# Altium PCB Pet_Feeder_PCB.PcbDoc (part 2 of 3)
Units mil, origin at the board's own origin, x right, y up, seen from the top; angles counter-clockwise.
Board outline 3600 x 2700 mil, 2 copper layers (Top Layer, Bottom Layer); 99 components, 71 nets, 320 pads, 396 vias.
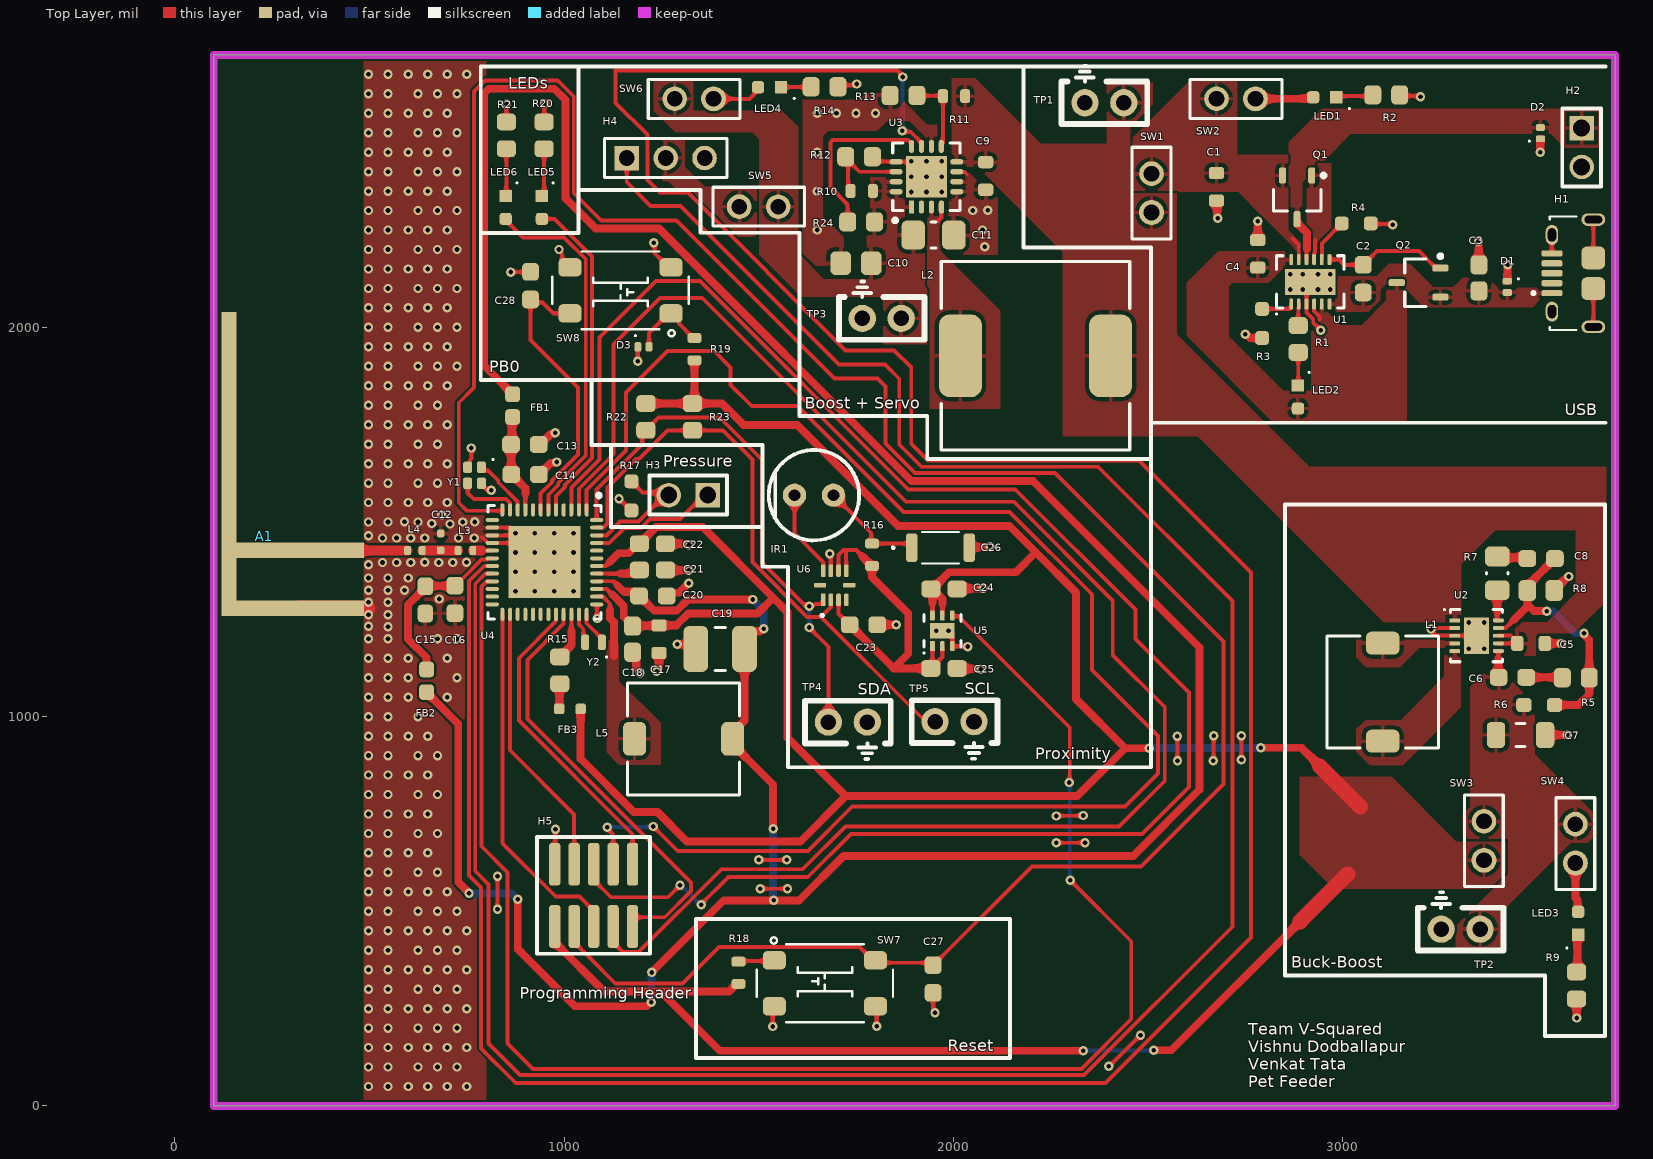
[diagram p0: Top Layer view]

## Part data (continued)
H5: library part FTSH-105-01-LM-DV-K, "Conn Unshrouded Header HDR 10 POS 1.27mm Solder ST Top Entry SMD Tube", Housing Color=Black, Manufacturer=Samtec, Max Operating Temperature=125°C, Min Operating Temperature=-55°C, Category=Connectors, ComponentLink1Description=https://datasheet.ciiva.com/10245/ftsh-mt-10245149.pdf?src-supplier=Avnet, ComponentLink1URL=https://datasheet.ciiva.com/10245/ftsh-mt-10245149.pdf?src-supplier=Avnet, ComponentLink2Description=https://datasheet.ciiva.com/16689/ftsh-mt-16689356.pdf?src-supplier=Avnet+Europe, ComponentLink2URL=https://datasheet.ciiva.com/16689/ftsh-mt-16689356.pdf?src-supplier=Avnet+Europe, Contact Material=Bronze, Contact Plating=Gold, Depth=3.43mm, Gender=Male, Housing Material=Polymer, Length=6.35mm, Manufacturer Part Number=FTSH-105-01-LM-DV-K, Number of Contacts=10, Number of Rows=2, Orientation=Straight, Packaging=Rail/Tube, Pitch=1.27mm, Pricing 1="1=4.62000, 10=4.19500, 92=3.69598, 460=3.14161, 1012=2.67960 (USD)", Radiation Hardening=No, RoHS=Yes, Stock 1=11199, Supplier 1=Digi-Key, Termination=Solder
IR1: library part IR333-A, "λP=940nm VF=1.2V View Angle=20", Case/Package=Radial, Forward Current=50mA, Forward Voltage=1.2V, Manufacturer=Everlight, Max Operating Temperature=85°C, Max Power Dissipation=100mW, Min Operating Temperature=-40°C, Package Quantity=500, Reverse Voltage=5V, Test Current=20mA, Category=LEDs, ComponentLink1Description=https://datasheet.ciiva.com/2107/201407061516067600-2107736.pdf?src-supplier=Digi-Key, ComponentLink1URL=https://datasheet.ciiva.com/2107/201407061516067600-2107736.pdf?src-supplier=Digi-Key, ComponentLink2Description=https://datasheet.ciiva.com/48438/ir333-a-eng-tds-48438869.pdf?src-supplier=Distrelec, ComponentLink2URL=https://datasheet.ciiva.com/48438/ir333-a-eng-tds-48438869.pdf?src-supplier=Distrelec, Depth=5.9mm, Lead Free="Lead Free", Length=5.9mm, Lens Style=Diffused,Colored,Circular, Manufacturer Part Number=IR333-A, Mount="Through Hole", Number of Elements=1, Number of LEDs=1, Number of Pins=2, Orientation="Top View", Packaging=Bulk, Power Dissipation=100mW, Pricing 1="1=0.32000, 10=0.25600, 100=0.11500, 500=0.10388, 1000=0.08533, 2000=0.07420, 5000=0.06678, 10000=0.05936, 25000=0.05565 (USD)", RoHS=Yes, RoHS Compliant=Yes, Series=-, Stock 1=45297, Supplier 1=Digi-Key, Viewing Angle=20°, Wavelength=940nm
L1 L5: library part B82472G6472M000, "Ind Power Shielded 4.7uH 20% 100KHz Ferrite 2.5A Blister T/R", Case/Package=SMD/SMT, DC Current=2.5A, DC Resistance (DCR)=30mR, Inductance=4.7uH, Inductance Tolerance=20%, Inductor Type=POWER, Manufacturer="TDK EPCOS", Max DC Current=2A, Package Quantity=1000, Test Frequency=100kHz, Category="Fixed Inductors", ComponentLink1Description=https://datasheet.ciiva.com/5874/78362-5874896.pdf?src-supplier=Farnell, ComponentLink1URL=https://datasheet.ciiva.com/5874/78362-5874896.pdf?src-supplier=Farnell, ComponentLink2Description=https://datasheet.ciiva.com/8003/78362-8003419.pdf?src-supplier=Element14, ComponentLink2URL=https://datasheet.ciiva.com/8003/78362-8003419.pdf?src-supplier=Element14, ComponentLink3Description=https://datasheet.ciiva.com/22700/1899161-22700808.pdf?src-supplier=Element14, ComponentLink3URL=https://datasheet.ciiva.com/22700/1899161-22700808.pdf?src-supplier=Element14, Core Material=Ferrite, Depth=7.5mm, Height=4.5mm, Length=7.3mm, Manufacturer Part Number=B82472G6472M000, Military Standard=Not, Mount="Surface Mount", Number of Pins=2, Packaging="Tape and Reel", Pricing 1="1=1.55000, 10=1.43500, 25=1.32480, 50=1.10420, 100=1.03790, 250=0.92748, 500=0.79496 (USD)", REACH SVHC="No SVHC", RMS Current (Irms)=2.5A, RoHS=Yes, Saturation Current=2A, Series=B82472G6, Shielding=Shielded, Stock 1=890, Supplier 1=Digi-Key, Termination=SMD/SMT, Tolerance=20%, Weight=0.052911oz, Width=7.3mm
L2: library part CDRH124NP-6R8MC, "Inductor Power Shielded Drum Core 6.8uH 20% 100KHz Ferrite 4.9A 23mOhm DCR T/R", Current Rating=4.9A, DC Resistance (DCR)=23mR, Inductance=6.8uH, Manufacturer=Sumida, Max Operating Temperature=100°C, Min Operating Temperature=-40°C, Package Quantity=500, Test Frequency=100kHz, Tolerance=20%, Category="Fixed Inductors", ComponentLink1Description=http://www.sumida.com/products/pdf/CDRH124.pdf?src-supplier=Avnet, ComponentLink1URL=http://www.sumida.com/products/pdf/CDRH124.pdf?src-supplier=Avnet, ComponentLink2Description=http://products.sumida.com/products/pdf/CDRH124.pdf?src-supplier=Digi-Key, ComponentLink2URL=http://products.sumida.com/products/pdf/CDRH124.pdf?src-supplier=Digi-Key, ComponentLink3Description=http://www.sumida.com/products/pdf/CDRH124.pdf?src-supplier=Future+Electronics, ComponentLink3URL=http://www.sumida.com/products/pdf/CDRH124.pdf?src-supplier=Future+Electronics, ComponentLink4Description=https://www.sumida.com/products/pdf/CDRH124.pdf?src-supplier=Mouser, ComponentLink4URL=https://www.sumida.com/products/pdf/CDRH124.pdf?src-supplier=Mouser, ComponentLink5Description=http://www.sumida.com/products/pdf/CDRH124.pdf?src-supplier=Avnet+Asia, ComponentLink5URL=http://www.sumida.com/products/pdf/CDRH124.pdf?src-supplier=Avnet+Asia, Core Material=Ferrite, Depth=12.3mm, Height=4.5mm, Height - Seated (Max)=0.177inch, Lead Free="Lead Free", Length=12.3mm, Manufacturer Part Number=CDRH124NP-6R8MC, Max DC Current=4.9A, Mount="Surface Mount", Packaging="Tape and Reel", Radiation Hardening=No, Rated Current-Max=4.9A, RoHS=Yes, RoHS Compliant=Yes, Series=CDRH124, Shielding=Shielded, Supplier 1=Digi-Key, Termination=SMD/SMT, Weight=0.08113oz, Width=0.472inch
L3 L4: library part 36401E1N9ATDF, "Ind High Frequency Chip Molded/Unshielded Thin Film 1.9nH 0.2nH 500MHz 13Q-Factor 560mA 0402 T/R", Case Code (Imperial)=0402, Case Code (Metric)=1005, DC Resistance (DCR)=350mR, Inductance=0.0019uH, Manufacturer="TE Connectivity", Max Current Rating=560mA, Max Frequency=500MHz, Max Operating Temperature=85°C, Min Operating Temperature=-40°C, Package Quantity=1000, Resistor Type="Thin Film", Self Resonant Frequency=8GHz, Tolerance=0.2%, Case/Package=0402, Category="Fixed Inductors", ComponentLink1Description=https://datasheet.ciiva.com/1131/eng-cd-1624108-ba-1131568.pdf?src-supplier=Farnell, ComponentLink1URL=https://datasheet.ciiva.com/1131/eng-cd-1624108-ba-1131568.pdf?src-supplier=Farnell, ComponentLink2Description=https://datasheet.ciiva.com/11800/0900766b80e1823e-11800596.pdf?src-supplier=RSComponents, ComponentLink2URL=https://datasheet.ciiva.com/11800/0900766b80e1823e-11800596.pdf?src-supplier=RSComponents, ComponentLink3Description=https://datasheet.ciiva.com/1129/1610600-1129220.pdf?src-supplier=Element14, ComponentLink3URL=https://datasheet.ciiva.com/1129/1610600-1129220.pdf?src-supplier=Element14, ComponentLink4Description=https://datasheet.ciiva.com/1129/1610600-1129221.pdf?src-supplier=Element14, ComponentLink4URL=https://datasheet.ciiva.com/1129/1610600-1129221.pdf?src-supplier=Element14, Depth=0.55mm, ELV=Compliant, Height=0.32mm, Lead/Base Style=SMD/SMT, Length=1mm, Manufacturer Part Number=36401E1N9ATDF, Max DC Current=560mA, Mount="Surface Mount", Number of Pins=2, Packaging="Tape and Reel", Pricing 1="1=0.21000, 10=0.19200, 25=0.17080, 50=0.14520, 100=0.12820, 250=0.11752, 500=0.10684 (USD)", Q Factor=13, Radiation Hardening=No, REACH SVHC=Unknown, RoHS=Yes, RoHS Compliant=Yes, Series=3640, Shielding=Unshielded, Stock 1=735, Supplier 1=Digi-Key, Technology="THIN FILM", Termination=SMD/SMT, Test Frequency=500MHz, Weight=2.3E-05oz, Width=0.5mm
LED1 LED2 LED3 LED4 LED5 LED6: library part LTST-C191KRKT, "0603(H=0.65mm) 红色 λD=631nm VR=5V VF=2.0V~2.4V IF=20mA PD=75mW", Case Code (Imperial)=0603, Case Code (Metric)=1608, Color=Red, Forward Current=30mA, Forward Voltage=2V, Lens Color=Colorless, Manufacturer="Vishay Lite-On", Max Operating Temperature=85°C, Min Operating Temperature=-55°C, Package Quantity=1, Power Dissipation=75mW, Reverse Voltage=5V, Test Current=20mA, Case/Package=0603, Category=LEDs, ComponentLink1Description=https://datasheet.ciiva.com/11773/0900766b80dc02b2-11773601.pdf?src-supplier=RSComponents, ComponentLink1URL=https://datasheet.ciiva.com/11773/0900766b80dc02b2-11773601.pdf?src-supplier=RSComponents, ComponentLink2Description=https://datasheet.ciiva.com/12400/lite-on-ltst-c191krkt-190135-12400910.pdf?src-supplier=Mouser, ComponentLink2URL=https://datasheet.ciiva.com/12400/lite-on-ltst-c191krkt-190135-12400910.pdf?src-supplier=Mouser, ComponentLink3Description=https://datasheet.ciiva.com/16212/ltst-c191krkt-16212419.pdf?src-supplier=Future+Electronics, ComponentLink3URL=https://datasheet.ciiva.com/16212/ltst-c191krkt-16212419.pdf?src-supplier=Future+Electronics, ComponentLink4Description=https://datasheet.ciiva.com/15117/getdatasheetpartid-141922-15117737.pdf?src-supplier=Verical, ComponentLink4URL=https://datasheet.ciiva.com/15117/getdatasheetpartid-141922-15117737.pdf?src-supplier=Verical, ComponentLink5Description=https://datasheet.ciiva.com/2109/s-110-ltst-c191krkt-2109971.pdf?src-supplier=Digi-Key, ComponentLink5URL=https://datasheet.ciiva.com/2109/s-110-ltst-c191krkt-2109971.pdf?src-supplier=Digi-Key, ComponentLink6Description=https://datasheet.ciiva.com/2109/s-110-ltst-c191krkt-2109970.pdf?src-supplier=Digi-Key, ComponentLink6URL=https://datasheet.ciiva.com/2109/s-110-ltst-c191krkt-2109970.pdf?src-supplier=Digi-Key, ComponentLink7Description=https://datasheet.ciiva.com/2109/s-110-ltst-c191krkt-2109972.pdf?src-supplier=Digi-Key, ComponentLink7URL=https://datasheet.ciiva.com/2109/s-110-ltst-c191krkt-2109972.pdf?src-supplier=Digi-Key, Depth=0.8mm, Dominant Wavelength=631nm, Height=0.55mm, Illumination Color=Red, Lead Free="Lead Free", Length=1.6mm, Lens Style=Clear,Diffused,Colorless,Rectangular, Lens Transparency=Clear, Luminous Intensity=54mcd, Manufacturer Part Number=LTST-C191KRKT, Mount="Surface Mount", Number of Elements=1, Number of LEDs=1, Number of Pins=2, Packaging="Tape and Reel", Power Rating=75mW, Pricing 1="1=0.26000, 10=0.14100, 100=0.06560, 500=0.06060, 1000=0.04747, 2000=0.04646 (USD)", Radiation Hardening=No, RoHS=Yes, RoHS Compliant=Yes, Stock 1=9, Supplier 1=Digi-Key, Viewing Angle=130°, Voltage=2V, Wavelength=639nm, Width=0.8mm
Q1 Q2: library part AO3419, "Trans MOSFET P-CH 20V 3.5A 3-Pin SOT-23", Case/Package=TO-236-3, Continuous Drain Current (ID)=3.5A, Drain to Source Voltage (Vdss)=20V, Input Capacitance=400pF, Manufacturer="Alpha & Omega Semiconductor", Max Operating Temperature=150°C, Max Power Dissipation=1.4W, Min Operating Temperature=-55°C, Category=MOSFETs, ComponentLink1Description=https://datasheet.ciiva.com/940/ao3419-940694.pdf?src-supplier=Digi-Key, ComponentLink1URL=https://datasheet.ciiva.com/940/ao3419-940694.pdf?src-supplier=Digi-Key, ComponentLink2Description=https://datasheet.ciiva.com/940/ao3419-940695.pdf?src-supplier=Digi-Key, ComponentLink2URL=https://datasheet.ciiva.com/940/ao3419-940695.pdf?src-supplier=Digi-Key, ComponentLink3Description=https://datasheet.ciiva.com/940/ao3419-940696.pdf?src-supplier=Digi-Key, ComponentLink3URL=https://datasheet.ciiva.com/940/ao3419-940696.pdf?src-supplier=Digi-Key, Lead Free="Lead Free", Manufacturer Part Number=AO3419, Mount="Surface Mount", Number of Elements=1, Number of Pins=3, Packaging="Tape and Reel", Power Dissipation=1.4W, Pricing 1="1=0.43000, 10=0.32200, 100=0.20060, 500=0.13728, 1000=0.10560 (USD)", Radiation Hardening=No, Rds On Max=85mR, RoHS=Yes, RoHS Compliant=Yes, Series=-, Stock 1=3227, Supplier 1=Digi-Key
R1 R2: library part CRCW060364R9FKEA, "Res Thick Film 0603 64.9 Ohm 1% 1/10W ±100ppm/°C Molded SMD SMD Paper T/R", Case Code (Imperial)=0603, Case Code (Metric)=1608, Manufacturer=Vishay, Max Operating Temperature=155°C, Max Power Dissipation=100mW, Min Operating Temperature=-55°C, Package Quantity=10, Resistance=64.9R, Resistance Tolerance=1%, Resistor Type="Thick Film", Temperature Coefficient=100ppm/°C, Voltage Rating=75V, Case/Package=0603, Category="Chip SMD Resistors", ComponentLink1Description=https://datasheet.ciiva.com/2525/dcrcwe3-2525455.pdf?src-supplier=Digi-Key, ComponentLink1URL=https://datasheet.ciiva.com/2525/dcrcwe3-2525455.pdf?src-supplier=Digi-Key, ComponentLink2Description=https://datasheet.ciiva.com/2525/dcrcwe3-2525457.pdf?src-supplier=Digi-Key, ComponentLink2URL=https://datasheet.ciiva.com/2525/dcrcwe3-2525457.pdf?src-supplier=Digi-Key, ComponentLink3Description=https://datasheet.ciiva.com/3257/dcrcwe3-3257816.pdf?src-supplier=Avnet, ComponentLink3URL=https://datasheet.ciiva.com/3257/dcrcwe3-3257816.pdf?src-supplier=Avnet, ComponentLink4Description=https://datasheet.ciiva.com/2525/dcrcwe3-2525456.pdf?src-supplier=Digi-Key, ComponentLink4URL=https://datasheet.ciiva.com/2525/dcrcwe3-2525456.pdf?src-supplier=Digi-Key, ComponentLink5Description=https://datasheet.ciiva.com/5541/dcrcwe3-109170-5541133.pdf?src-supplier=Mouser, ComponentLink5URL=https://datasheet.ciiva.com/5541/dcrcwe3-109170-5541133.pdf?src-supplier=Mouser, ComponentLink6Description=https://datasheet.ciiva.com/7823/1697337-7823000.pdf?src-supplier=Element14, ComponentLink6URL=https://datasheet.ciiva.com/7823/1697337-7823000.pdf?src-supplier=Element14, ComponentLink7Description=https://datasheet.ciiva.com/7823/1697337-7823001.pdf?src-supplier=Element14, ComponentLink7URL=https://datasheet.ciiva.com/7823/1697337-7823001.pdf?src-supplier=Element14, ComponentLink8Description=https://datasheet.ciiva.com/22674/1847332-22674604.pdf?src-supplier=Element14, ComponentLink8URL=https://datasheet.ciiva.com/22674/1847332-22674604.pdf?src-supplier=Element14, ComponentLink9Description=https://datasheet.ciiva.com/16204/dcrcwe3-16204218.pdf?src-supplier=Future+Electronics, ComponentLink9URL=https://datasheet.ciiva.com/16204/dcrcwe3-16204218.pdf?src-supplier=Future+Electronics, ComponentLink10Description=https://datasheet.ciiva.com/22705/1697337-22705559.pdf?src-supplier=Element14, ComponentLink10URL=https://datasheet.ciiva.com/22705/1697337-22705559.pdf?src-supplier=Element14, Construction=Rectangular, Contact Plating=Tin, Depth=0.85mm, Features="Automotive AEC-Q200", Height=0.02inch, Lead Free="Lead Free", Length=1.55mm, Manufacturer Part Number=CRCW060364R9FKEA, Military Standard=Not, Number of Pins=2, Number of Terminations=2, Packaging="Tape and Reel", Power Rating=100mW, Pricing 1="1=0.10000, 10=0.03800, 100=0.01560, 1000=0.00701, 2500=0.00608 (USD)", Radiation Hardening=No, REACH SVHC=Unknown, RoHS=Yes, RoHS Compliant=Yes, Series=CRCW, Stock 1=23690, Supplier 1=Digi-Key, Termination=SMD/SMT, Tolerance=1%, Voltage Rating (DC)=75V, Weight=7.1E-05oz, Width=0.033inch
R3 R4 R17: library part CRCW06032K00FKTA, "Res Thick Film 0603 2K Ohm 1% 1/10W ±100ppm/°C Molded SMD SMD Paper T/R", Case Code (Imperial)=0603, Case Code (Metric)=1608, Manufacturer="Vishay Dale", Max Operating Temperature=155°C, Max Power Dissipation=100mW, Min Operating Temperature=-55°C, Package Quantity=5000, Resistance=2kR, Resistance Tolerance=1%, Resistor Type="Thick Film", Temperature Coefficient=100ppm/°C, Voltage Rating=75V, Case/Package=0603, Category="Chip SMD Resistors", ComponentLink1Description=https://datasheet.ciiva.com/15159/getdatasheetpartid-28881-15159221.pdf?src-supplier=Verical, ComponentLink1URL=https://datasheet.ciiva.com/15159/getdatasheetpartid-28881-15159221.pdf?src-supplier=Verical, ComponentLink2Description=https://datasheet.ciiva.com/9093/dcrcw-9093590.pdf?src-supplier=Avnet, ComponentLink2URL=https://datasheet.ciiva.com/9093/dcrcw-9093590.pdf?src-supplier=Avnet, ComponentLink3Description=https://datasheet.ciiva.com/2565/dcrcw-2565199.pdf?src-supplier=Digi-Key, ComponentLink3URL=https://datasheet.ciiva.com/2565/dcrcw-2565199.pdf?src-supplier=Digi-Key, ComponentLink4Description=https://datasheet.ciiva.com/9094/dcrcw-9094813.pdf?src-supplier=Avnet, ComponentLink4URL=https://datasheet.ciiva.com/9094/dcrcw-9094813.pdf?src-supplier=Avnet, Construction=Rectangular, Contact Plating=Tin,Lead, Depth=0.85mm, Features="Automotive AEC-Q200", Height=0.02inch, Lead Free="Contains Lead", Length=1.55mm, Manufacturer Part Number=CRCW06032K00FKTA, Military Standard=Not, Mount="Surface Mount", Number of Pins=2, Number of Terminations=2, Packaging="Tape and Reel", Power Dissipation=100mW, Power Rating=100mW, Pricing 1="1=0.16000, 10=0.13900, 100=0.05350, 1000=0.02353, 2500=0.02032 (USD)", Radiation Hardening=No, REACH SVHC=Unknown, RoHS=No, RoHS Compliant=No, Series=CRCW, Stock 1=4209, Supplier 1=Digi-Key, Termination=SMD/SMT, Tolerance=1%, Voltage Rating (DC)=75V, Weight=7.1E-05oz, Width=0.033inch
R5: library part RCS06036K49FKEA, "RES SMD 6.49K OHM 1% 1/4W 0603", Case/Package=0603, Manufacturer="Vishay Dale", Max Operating Temperature=155°C, Max Power Dissipation=250mW, Min Operating Temperature=-55°C, Package Quantity=5000, Resistance=6.49kR, Resistor Type="Thick Film", Temperature Coefficient=100ppm/°C, Tolerance=1%, Category="Chip SMD Resistors", ComponentLink1Description=http://www.vishay.com/docs/20065/rcse3.pdf?src-supplier=Digi-Key, ComponentLink1URL=http://www.vishay.com/docs/20065/rcse3.pdf?src-supplier=Digi-Key, Features="Automotive AEC-Q200", Height=0.02inch, Length=0.061inch, Manufacturer Part Number=RCS06036K49FKEA, Number of Terminations=2, Packaging="Tape and Reel", Pricing 1="1=0.15000, 10=0.13300, 100=0.05120, 1000=0.02252, 2500=0.01945 (USD)", RoHS=Yes, Stock 1=9540, Supplier 1=Digi-Key, Width=0.033inch
R6: library part CMP0603-FX-1004ELF, "Resistor, ResHighPower 0603 1M 1% 1/4W TC100", Manufacturer=Bourns, Category="Chip SMD Resistors", Manufacturer Part Number=CMP0603-FX-1004ELF, Pricing 1="1=0.15000, 10=0.13200, 100=0.05060, 1000=0.02226, 2500=0.01923 (USD)", RoHS=Yes, RoHS Compliant=Yes, Stock 1=4809, Supplier 1=Digi-Key
R7: library part RCC080549K9FKEA, "Res Thick Film 0805 49.9K Ohm 1% 0.25W(1/4W) ±100ppm/C Pad SMD Automotive T/R", Manufacturer="Vishay Dale", Category="Chip SMD Resistors", Manufacturer Part Number=RCC080549K9FKEA, Pricing 1="1=0.19000, 10=0.16100, 100=0.06280, 1000=0.02629, 2500=0.02410 (USD)", RoHS=Yes, Stock 1=2991, Supplier 1=Digi-Key
R8: library part RK73H2ATTD2213F, "Res Thick Film 0805 221K Ohm 1% 0.25W(1/4W) ±100ppm/C Pad SMD Automotive T/R", Case Code (Imperial)=0805, Case Code (Metric)=2012, Manufacturer="KOA Speer", Max Operating Temperature=155°C, Min Operating Temperature=-55°C, Package Quantity=5000, Power Rating=125mW, Resistance=221kR, Temperature Coefficient=100ppm/°C, Tolerance=1%, Voltage Rating=150V, Case/Package=0805, Category="Chip SMD Resistors", ComponentLink1Description=https://datasheet.ciiva.com/3882/39733851s9852373n5146-3882825.pdf?src-supplier=Arrow+Electronics, ComponentLink1URL=https://datasheet.ciiva.com/3882/39733851s9852373n5146-3882825.pdf?src-supplier=Arrow+Electronics, Height=0.5mm, Lead Free="Lead Free", Length=2mm, Manufacturer Part Number=RK73H2ATTD2213F, Packaging="Tape and Reel", Pricing 1="1=0.10000, 10=0.04200, 100=0.01710, 1000=0.00768, 2500=0.00666 (USD)", RoHS=Yes, RoHS Compliant=Yes, Series=RK73H, Stock 1=28340, Supplier 1=Digi-Key, Termination=SMD/SMT, Voltage Rating (DC)=150V, Width=1.25mm
R9 R14 R20 R21: library part CRCW060347R0FKEAC, "Res Thick Film 0603 47 Ohm 1% 1/10W ±100ppm/°C Molded SMD Paper T/R", Case/Package=Molded, Manufacturer="Vishay Semiconductors", Max Operating Temperature=155°C, Min Operating Temperature=-55°C, Power Rating=100mW, Resistance=47R, Resistor Type="Thick Film", Temperature Coefficient=100ppm/°C, Tolerance=1%, Category="Chip SMD Resistors", ComponentLink1Description=http://www.vishay.com/docs/28773/crcwce3.pdf?src-supplier=Digi-Key, ComponentLink1URL=http://www.vishay.com/docs/28773/crcwce3.pdf?src-supplier=Digi-Key, ComponentLink2Description=http://www.vishay.com/docs/20035/dcrcwe3.pdf?src-supplier=Avnet+Asia, ComponentLink2URL=http://www.vishay.com/docs/20035/dcrcwe3.pdf?src-supplier=Avnet+Asia, Contact Plating=Tin, Lead Free="Lead Free", Length=1.55mm, Manufacturer Part Number=CRCW060347R0FKEAC, Mount="Surface Mount", Pricing 1="1=0.10000, 10=0.03600, 100=0.01450, 1000=0.00652, 2500=0.00566 (USD)", RoHS=Yes, RoHS Compliant=Yes, Stock 1=3057, Supplier 1=Digi-Key, Termination=Wraparound
R10: library part RMCF0603FT1M62, "Res Thick Film 0603 1.62M Ohm 1% 1/10W ±200ppm/°C Molded SMD SMD Paper T/R", Case/Package=0603, Manufacturer="Stackpole Electronics", Max Operating Temperature=155°C, Max Power Dissipation=100mW, Min Operating Temperature=-55°C, Resistance=1.62MR, Resistor Type="Thick Film", Temperature Coefficient=200ppm/°C, Tolerance=1%, Category="Chip SMD Resistors", ComponentLink1Description=https://www.seielect.com/catalog/SEI-RMCF_RMCP.pdf?src-supplier=Avnet, ComponentLink1URL=https://www.seielect.com/catalog/SEI-RMCF_RMCP.pdf?src-supplier=Avnet, ComponentLink2Description=https://www.seielect.com/Catalog/SEI-RMCF_RMCP.pdf?src-supplier=Digi-Key, ComponentLink2URL=https://www.seielect.com/Catalog/SEI-RMCF_RMCP.pdf?src-supplier=Digi-Key, ComponentLink3Description=https://www.seielect.com/catalog/SEI-Packaging.pdf?src-supplier=Digi-Key, ComponentLink3URL=https://www.seielect.com/catalog/SEI-Packaging.pdf?src-supplier=Digi-Key, Contact Plating=Tin,Matte, Features="Automotive AEC-Q200", Height=0.022inch, Length=0.061inch, Manufacturer Part Number=RMCF0603FT1M62, Mount="Surface Mount", Number of Terminations=2, Packaging="Tape and Reel", Pricing 1="1=0.10000, 10=0.02500, 100=0.01020, 1000=0.00457, 2500=0.00397 (USD)", Radiation Hardening=No, RoHS=Yes, RoHS Compliant=Yes, Series=RMCF, Stock 1=124087, Supplier 1=Digi-Key, Width=0.031inch
R11: library part RMCF0603FT2M40, "Res Thick Film 0603 2.4M Ohm 1% 1/10W ±200ppm/°C Molded SMD SMD Paper T/R", Case Code (Imperial)=0603, Case Code (Metric)=1608, Manufacturer="Stackpole Electronics", Max Operating Temperature=155°C, Max Power Dissipation=100mW, Min Operating Temperature=-55°C, Package Quantity=5000, Resistance=2.4MR, Resistor Type="Thick Film", Temperature Coefficient=200ppm/°C, Tolerance=1%, Case/Package=0603, Category="Chip SMD Resistors", ComponentLink1Description=https://www.seielect.com/Catalog/SEI-RMCF_RMCP.pdf?src-supplier=Digi-Key, ComponentLink1URL=https://www.seielect.com/Catalog/SEI-RMCF_RMCP.pdf?src-supplier=Digi-Key, ComponentLink2Description=https://www.seielect.com/catalog/SEI-Packaging.pdf?src-supplier=Digi-Key, ComponentLink2URL=https://www.seielect.com/catalog/SEI-Packaging.pdf?src-supplier=Digi-Key, ComponentLink3Description=https://www.seielect.com/catalog/SEI-RMCF_RMCP.pdf?src-supplier=Avnet, ComponentLink3URL=https://www.seielect.com/catalog/SEI-RMCF_RMCP.pdf?src-supplier=Avnet, ComponentLink4Description=http://www.seielect.com/Catalog/SEI-RMCF_RMCP.pdf?src-supplier=Digi-Key, ComponentLink4URL=http://www.seielect.com/Catalog/SEI-RMCF_RMCP.pdf?src-supplier=Digi-Key, Contact Plating=Tin,Matte, Features="Automotive AEC-Q200", Height=0.022inch, Length=0.061inch, Manufacturer Part Number=RMCF0603FT2M40, Mount="Surface Mount", Number of Terminations=2, Packaging="Tape and Reel", Pricing 1="1=0.10000, 10=0.02500, 100=0.01020, 1000=0.00457, 2500=0.00397 (USD)", Radiation Hardening=No, RoHS=Yes, RoHS Compliant=Yes, Series=RMCF, Stock 1=8694, Supplier 1=Digi-Key, Width=0.031inch
R12: library part RCS0603180KFKEA, "RES SMD 180K OHM 1% 1/4W 0603", Case/Package=0603, Manufacturer="Vishay Dale", Max Operating Temperature=155°C, Max Power Dissipation=250mW, Min Operating Temperature=-55°C, Package Quantity=5000, Resistance=180kR, Resistor Type="Thick Film", Temperature Coefficient=100ppm/°C, Tolerance=1%, Category="Chip SMD Resistors", ComponentLink1Description=http://www.vishay.com/docs/20065/rcse3.pdf?src-supplier=Digi-Key, ComponentLink1URL=http://www.vishay.com/docs/20065/rcse3.pdf?src-supplier=Digi-Key, Features="Automotive AEC-Q200", Height=0.02inch, Length=0.061inch, Manufacturer Part Number=RCS0603180KFKEA, Number of Terminations=2, Packaging="Tape and Reel", Pricing 1="1=0.15000, 10=0.13300, 100=0.05120, 1000=0.02252, 2500=0.01945 (USD)", RoHS=Yes, RoHS Compliant=Yes, Stock 1=4602, Supplier 1=Digi-Key, Width=0.033inch
R13: library part RCS0603390KFKEA, "RES SMD 390K OHM 1% 1/4W 0603", Case/Package=0603, Manufacturer="Vishay Dale", Max Operating Temperature=155°C, Max Power Dissipation=250mW, Min Operating Temperature=-55°C, Package Quantity=5000, Resistance=390kR, Resistor Type="Thick Film", Temperature Coefficient=100ppm/°C, Tolerance=1%, Category="Chip SMD Resistors", ComponentLink1Description=http://www.vishay.com/docs/20065/rcse3.pdf?src-supplier=Digi-Key, ComponentLink1URL=http://www.vishay.com/docs/20065/rcse3.pdf?src-supplier=Digi-Key, Features="Automotive AEC-Q200", Height=0.02inch, Length=0.061inch, Manufacturer Part Number=RCS0603390KFKEA, Number of Terminations=2, Packaging="Tape and Reel", Pricing 1="1=0.15000, 10=0.13300, 100=0.05120, 1000=0.02252, 2500=0.01945 (USD)", RoHS=Yes, RoHS Compliant=Yes, Stock 1=4751, Supplier 1=Digi-Key, Width=0.033inch
R15: library part CRCW06031R00FNEB, "Thick Film Resistors - SMD 1/10watt 1ohms 1% 200ppm", Case Code (Imperial)=0603, Case Code (Metric)=1608, Manufacturer="Vishay Dale", Max Operating Temperature=155°C, Max Power Dissipation=100mW, Min Operating Temperature=-55°C, Package Quantity=10000, Resistance=1R, Resistor Type="Thick Film", Temperature Coefficient=200ppm/°C, Tolerance=1%, Voltage Rating=75V, Case/Package=0603, Category="Chip SMD Resistors", ComponentLink1Description=https://datasheet.ciiva.com/5549/dcrcwe3-109170-5549015.pdf?src-supplier=Mouser, ComponentLink1URL=https://datasheet.ciiva.com/5549/dcrcwe3-109170-5549015.pdf?src-supplier=Mouser, Contact Plating=Tin, Features="Automotive AEC-Q200", Height=0.02inch, Lead Free="Lead Free", Length=0.061inch, Manufacturer Part Number=CRCW06031R00FNEB, Number of Terminations=2, Packaging="Tape and Reel", Power Rating=100mW, Pricing 1="1=0.10000, 10=0.07700, 100=0.03120, 1000=0.01402, 2500=0.01217, 5000=0.01005 (USD)", Radiation Hardening=No, RoHS=Yes, RoHS Compliant=Yes, Series=CRCW, Stock 1=18550, Supplier 1=Digi-Key, Termination=SMD/SMT, Weight=7.1E-05oz, Width=0.033inch
R16: library part RMCF0603FT30R0, "Res Thick Film 0603 30 Ohm 1% 1/10W ±100ppm/°C Molded SMD SMD Paper T/R", Case Code (Imperial)=0603, Case Code (Metric)=1608, Manufacturer="Stackpole Electronics", Max Operating Temperature=155°C, Max Power Dissipation=100mW, Min Operating Temperature=-55°C, Package Quantity=5000, Resistance=30R, Resistor Type="Thick Film", Temperature Coefficient=100ppm/°C, Tolerance=1%, Case/Package=0603, Category="Chip SMD Resistors", ComponentLink1Description=https://www.seielect.com/catalog/SEI-RMCF_RMCP.pdf?src-supplier=Avnet, ComponentLink1URL=https://www.seielect.com/catalog/SEI-RMCF_RMCP.pdf?src-supplier=Avnet, ComponentLink2Description=https://www.seielect.com/catalog/sei-rmcf_rmcp.pdf?src-supplier=Digi-Key, ComponentLink2URL=https://www.seielect.com/catalog/sei-rmcf_rmcp.pdf?src-supplier=Digi-Key, ComponentLink3Description=https://www.seielect.com/catalog/SEI-Packaging.pdf?src-supplier=Digi-Key, ComponentLink3URL=https://www.seielect.com/catalog/SEI-Packaging.pdf?src-supplier=Digi-Key, Contact Plating=Tin,Matte, Features="Automotive AEC-Q200", Height=0.022inch, Lead Free="Contains Lead", Length=0.061inch, Manufacturer Part Number=RMCF0603FT30R0, Mount="Surface Mount", Number of Terminations=2, Packaging="Tape and Reel", Pricing 1="1=0.10000, 10=0.01700, 100=0.00680, 1000=0.00305, 2500=0.00264 (USD)", Radiation Hardening=No, RoHS=Yes, RoHS Compliant=Yes, Series=RMCF, Stock 1=3655, Supplier 1=Digi-Key, Width=0.031inch
R18 R19: library part RMCF0603FT1K00, "Res Thick Film 0603 1K Ohm 1% 0.1W(1/10W) ±100ppm/C Pad SMD Automotive T/R", Case Code (Imperial)=0603, Case Code (Metric)=1608, Manufacturer="Stackpole Electronics", Max Operating Temperature=155°C, Max Power Dissipation=100mW, Min Operating Temperature=-55°C, Resistance=1kR, Resistor Type="Thick Film", Temperature Coefficient=100ppm/°C, Tolerance=1%, Case/Package=0603, Category="Chip SMD Resistors", ComponentLink1Description=https://www.seielect.com/catalog/sei-rmcf_rmcp.pdf?src-supplier=Digi-Key, ComponentLink1URL=https://www.seielect.com/catalog/sei-rmcf_rmcp.pdf?src-supplier=Digi-Key, ComponentLink2Description=https://www.seielect.com/catalog/SEI-RMCF_RMCP.pdf?src-supplier=Avnet, ComponentLink2URL=https://www.seielect.com/catalog/SEI-RMCF_RMCP.pdf?src-supplier=Avnet, ComponentLink3Description=https://www.seielect.com/catalog/SEI-Packaging.pdf?src-supplier=Avnet, ComponentLink3URL=https://www.seielect.com/catalog/SEI-Packaging.pdf?src-supplier=Avnet, ComponentLink4Description=https://www.seielect.com/catalog/SEI-Packaging.pdf?src-supplier=Arrow+Electronics, ComponentLink4URL=https://www.seielect.com/catalog/SEI-Packaging.pdf?src-supplier=Arrow+Electronics, ComponentLink5Description=https://www.seielect.com/catalog/SEI-RMCF_RMCP.pdf?src-supplier=Avnet+Asia, ComponentLink5URL=https://www.seielect.com/catalog/SEI-RMCF_RMCP.pdf?src-supplier=Avnet+Asia, ComponentLink6Description=http://www.seielect.com/Catalog/SEI-rmc.pdf?src-supplier=Future+Electronics, ComponentLink6URL=http://www.seielect.com/Catalog/SEI-rmc.pdf?src-supplier=Future+Electronics, ComponentLink7Description=https://www.seielect.com/catalog/SEI-Packaging.pdf?src-supplier=Verical, ComponentLink7URL=https://www.seielect.com/catalog/SEI-Packaging.pdf?src-supplier=Verical, ComponentLink8Description=https://www.seielect.com/catalog/SEI-Packaging.pdf?src-supplier=Quest, ComponentLink8URL=https://www.seielect.com/catalog/SEI-Packaging.pdf?src-supplier=Quest, Construction=Rectangular, Contact Plating=Tin,Matte, Depth=0.8mm, Features="Automotive AEC-Q200", Height=0.022inch, Lead Free="Lead Free", Length=1.55mm, Manufacturer Part Number=RMCF0603FT1K00, Military Standard=Not, Mount="Surface Mount", Number of Terminations=2, Packaging="Tape and Reel", Power Rating=100mW, Pricing 1="1=0.10000, 10=0.01700, 100=0.00680, 1000=0.00305, 2500=0.00264 (USD)", Radiation Hardening=No, RoHS=Yes, RoHS Compliant=Yes, Series=RMCF, Size Code=0603, Supplier 1=Digi-Key, Width=0.031inch
R22 R23 R24: library part CRCW060310K0FKEAHP, "Res Thick Film 0603 10K Ohm 1% 0.33W(1/3W) ±100ppm/°C Pad SMD Automotive T/R", Case Code (Imperial)=0603, Case Code (Metric)=1608, Manufacturer=Vishay, Max Operating Temperature=155°C, Max Power Dissipation=250mW, Min Operating Temperature=-55°C, Package Quantity=10, Resistance=10kR, Resistance Tolerance=1%, Resistor Type="Thick Film", Temperature Coefficient=100ppm/°C, Voltage Rating=75V, Case/Package=0603, Category="Chip SMD Resistors", ComponentLink1Description=https://datasheet.ciiva.com/9052/crcwhpe3-9052617.pdf?src-supplier=Avnet, ComponentLink1URL=https://datasheet.ciiva.com/9052/crcwhpe3-9052617.pdf?src-supplier=Avnet, ComponentLink2Description=https://datasheet.ciiva.com/2472/crcwhpe3-2472532.pdf?src-supplier=Digi-Key, ComponentLink2URL=https://datasheet.ciiva.com/2472/crcwhpe3-2472532.pdf?src-supplier=Digi-Key, ComponentLink3Description=https://datasheet.ciiva.com/2472/crcwhpe3-2472533.pdf?src-supplier=Digi-Key, ComponentLink3URL=https://datasheet.ciiva.com/2472/crcwhpe3-2472533.pdf?src-supplier=Digi-Key, ComponentLink4Description=https://datasheet.ciiva.com/2472/crcwhpe3-2472534.pdf?src-supplier=Digi-Key, ComponentLink4URL=https://datasheet.ciiva.com/2472/crcwhpe3-2472534.pdf?src-supplier=Digi-Key, ComponentLink5Description=https://datasheet.ciiva.com/5548/crcwhpe3-46056-5548143.pdf?src-supplier=Mouser, ComponentLink5URL=https://datasheet.ciiva.com/5548/crcwhpe3-46056-5548143.pdf?src-supplier=Mouser, ComponentLink6Description=https://datasheet.ciiva.com/28588/1912814-28588878.pdf?src-supplier=Element14, ComponentLink6URL=https://datasheet.ciiva.com/28588/1912814-28588878.pdf?src-supplier=Element14, Construction=Rectangular, Contact Plating=Tin, Depth=0.85mm, Features="Automotive AEC-Q200", Height=0.45mm, Lead Free="Lead Free", Length=1.6mm, Manufacturer Part Number=CRCW060310K0FKEAHP, Military Standard=Not, Number of Terminations=2, Packaging="Tape and Reel", Power Rating=250mW, Pricing 1="1=0.17000, 10=0.14800, 100=0.05790, 1000=0.02422, 2500=0.02220 (USD)", Radiation Hardening=No, REACH SVHC=Unknown, RoHS=Yes, RoHS Compliant=Yes, Series=CRCW-HP, Stock 1=391663, Supplier 1=Digi-Key, Technology="THICK FILM", Termination=SMD/SMT, Tolerance=1%, Voltage Rating (DC)=75V, Weight=7.1E-05oz, Width=0.033inch
SW1 SW2 SW3 SW4 SW5 SW6: library part PRPC001DAAN-RC, "PBT/Brass 2 Position 2.54 mm Pitch Straight Male Breakaway Header", Color=Black, Manufacturer=Sullins, Package Quantity=1, Category=Connectors, ComponentLink1Description=https://datasheet.ciiva.com/741/xrxczzzdxxn-rc-11636-b-741284.pdf?src-supplier=Digi-Key, ComponentLink1URL=https://datasheet.ciiva.com/741/xrxczzzdxxn-rc-11636-b-741284.pdf?src-supplier=Digi-Key, Connector Type="Male Pin", Contact Mating Length=0.23inch, Contact Plating=Gold, Contact Type="Male Pin", Manufacturer Part Number=PRPC001DAAN-RC, Mount="Through Hole", Number of Positions=2, Number of Rows=2, Packaging=Bulk, Pricing 1="1=0.08000, 10=0.07300, 25=0.05400, 50=0.04640, 100=0.04490, 250=0.03872, 500=0.03716 (USD)", RoHS=Yes, Row Spacing=0.1inch, Series=-, Stock 1=15318, Supplier 1=Digi-Key, Termination=Solder
SW7 SW8: library part TL3305AF160QG, "TL3305A Series SPST 12 V 4.5 x 4.5 mm 160 gf Top Actuated SMT Tactile Switch", Manufacturer=E-Switch, Max Operating Temperature=70°C, Min Operating Temperature=-20°C, Operating Force=160gf, Actuator Type=Standard, Category="Tactile Switches", ComponentLink1Description=http://www.farnell.com/datasheets/2554191.pdf?src-supplier=Farnell, ComponentLink1URL=http://www.farnell.com/datasheets/2554191.pdf?src-supplier=Farnell, ComponentLink2Description=http://spec_sheets.e-switch.com/specs/P010468.pdf?src-supplier=Digi-Key, ComponentLink2URL=http://spec_sheets.e-switch.com/specs/P010468.pdf?src-supplier=Digi-Key, ComponentLink3Description=http://www.farnell.com/datasheets/2554191.pdf?src-supplier=Newark, ComponentLink3URL=http://www.farnell.com/datasheets/2554191.pdf?src-supplier=Newark, Illumination Type=Non-Illuminated, Lead Free="Lead Free", Manufacturer Part Number=TL3305AF160QG, Mechanical Life=500000Cycles, Mount="Surface Mount", Packaging="Tape and Reel", Pricing 1="1=0.21000, 10=0.20500, 25=0.19440, 100=0.17600, 250=0.16048, 500=0.14918, 1000=0.12726 (USD)", RoHS=Yes, RoHS Compliant=Yes, Stock 1=727, Supplier 1=Digi-Key, Switch Function=Off-Mom, Switch Travel=0.2mm, Termination="Gull Wing", Throw Configuration=SPST
TP1 TP2 TP3 TP4 TP5: library part TP_10x_Probe, "Test Point 300 mil centers"
U1: "IC USB POWER MANAGER 12-DFN", Case/Package=DFN, Manufacturer="Analog Devices / Linear Technology", Max Operating Temperature=85°C, Min Operating Temperature=-40°C, Package Quantity=2500, Category="Battery Management", ComponentLink1Description=https://datasheet.ciiva.com/1933/25032-1933748.pdf?src-supplier=Digi-Key, ComponentLink1URL=https://datasheet.ciiva.com/1933/25032-1933748.pdf?src-supplier=Digi-Key, Length=4mm, Manufacturer Part Number=LTC4067EDE#TRPBF, Number of Cells=1, Number of Outputs=1, Number of Pins=12, Packaging="Tape and Reel", Pricing 1="1=5.17000, 10=4.64200, 25=4.38840, 100=3.80330, 250=3.60824, 500=3.23766, 1000=3.03600 (USD)", RoHS=Yes, RoHS Compliant=Yes, Series=-, Stock 1=1489, Supplier 1=Digi-Key
U2: "Dp-Swreg/Monolithic 1A Low Noise, Buck-Boost Dc/Dc Converter", Case/Package=DFN, Manufacturer="Analog Devices / Linear Technology", Max Operating Temperature=125°C, Min Input Voltage=1.8V, Min Operating Temperature=-40°C, Output Current=1A, Output Voltage=5.5V, Package Quantity=2500, Switching Frequency=2MHz, Category="Voltage Regulators - Switching", ComponentLink1Description=https://datasheet.ciiva.com/2032/40104-2032093.pdf?src-supplier=Digi-Key, ComponentLink1URL=https://datasheet.ciiva.com/2032/40104-2032093.pdf?src-supplier=Digi-Key, Efficiency=95%, Manufacturer Part Number=LTC3536EDD#TRPBF, Number of Outputs=1, Number of Pins=10, Output Type=Adjustable, Packaging="Tape and Reel", Pricing 1="1=7.42000, 10=6.70000, 25=6.38880, 100=5.54720, 250=5.29788, 500=4.85100 (USD)", RoHS=Yes, RoHS Compliant=Yes, Series=-, Stock 1=9880, Supplier 1=Digi-Key, Synchronous Rectifier=Yes
U3: "5-V Output, 1-A, 96% Efficient Boost Converter w/20uA Iq in TSSOP-16 16-QFN -40 to 85", Case/Package=VQFN, Manufacturer="Texas Instruments", Max Input Voltage=5.5V, Max Operating Temperature=85°C, Max Output Current=1A, Min Input Voltage=1.8V, Min Operating Temperature=-40°C, Min Output Voltage=5V, Package Quantity=1, Quiescent Current=20uA, Switching Frequency=600kHz, Category="Voltage Regulators - Switching", ComponentLink1Description=https://datasheet.ciiva.com/15113/getdatasheetpartid-188315-15113727.pdf?src-supplier=Verical, ComponentLink1URL=https://datasheet.ciiva.com/15113/getdatasheetpartid-188315-15113727.pdf?src-supplier=Verical, ComponentLink2Description=https://datasheet.ciiva.com/26896/tps61032rsar-26896598.pdf?src-supplier=IIIC, ComponentLink2URL=https://datasheet.ciiva.com/26896/tps61032rsar-26896598.pdf?src-supplier=IIIC, ComponentLink3Description=https://datasheet.ciiva.com/2026/tps61030-2026189.pdf?src-supplier=Digi-Key, ComponentLink3URL=https://datasheet.ciiva.com/2026/tps61030-2026189.pdf?src-supplier=Digi-Key, ComponentLink4Description=https://datasheet.ciiva.com/2026/tps61030-2026190.pdf?src-supplier=Digi-Key, ComponentLink4URL=https://datasheet.ciiva.com/2026/tps61030-2026190.pdf?src-supplier=Digi-Key, ComponentLink5Description=https://datasheet.ciiva.com/2026/tps61030-2026191.pdf?src-supplier=Digi-Key, ComponentLink5URL=https://datasheet.ciiva.com/2026/tps61030-2026191.pdf?src-supplier=Digi-Key, ComponentLink6Description=https://datasheet.ciiva.com/22684/1902788-22684647.pdf?src-supplier=Element14, ComponentLink6URL=https://datasheet.ciiva.com/22684/1902788-22684647.pdf?src-supplier=Element14, Efficiency=96%, Lead Free="Lead Free", Manufacturer Part Number=TPS61032RSAR, Mount="Surface Mount", Nominal Output Voltage=5V, Number of Outputs=1, Number of Pins=16, Operating Supply Voltage=5.5V, Output Configuration=Positive, Output Current=1A, Output Type=Fixed, Output Voltage=5V, Packaging="Tape and Reel", Pricing 1="1=3.13000, 10=2.80800, 25=2.65440, 100=2.30060, 250=2.18260, 500=1.95844, 1000=1.94775 (USD)", Radiation Hardening=No, REACH SVHC="No SVHC", RoHS=Yes, RoHS Compliant=Yes, Series=-, Supplier 1=Digi-Key, Synchronous Rectifier=Yes, Topology=Boost, Weight=0.001464oz, Width=4mm
U4: "Blue Gecko QFN48 2.4 G 19 dB BLE/Proprietary 512 kB 64 kB(RAM) 31GPIO", Manufacturer="Silicon Labs", Supplier Part Number 1=336-5922-ND, Category="RF Receivers, Transceivers", ComponentLink1Description=http://www.farnell.com/datasheets/2813683.pdf?src-supplier=Farnell, ComponentLink1URL=http://www.farnell.com/datasheets/2813683.pdf?src-supplier=Farnell, Manufacturer Part Number=EFR32BG13P732F512GM48-D, Pricing 1="1=8.42000, 10=7.72000, 25=7.01800, 80=6.31625, 230=5.78987, 440=5.26350, 945=4.78499 (USD)", RoHS=Yes, Supplier 1=Digi-Key